# Altium PCB plantGrowthLeds_4chnl.PcbDoc
Units mm, origin at the board's own origin, x right, y up, seen from the top; angles counter-clockwise.
Board outline 98 x 80 mm, 2 copper layers (Top Layer, Bottom Layer), stack 0.971 mm thick; 39 components, 30 nets, 141 pads, 0 vias.
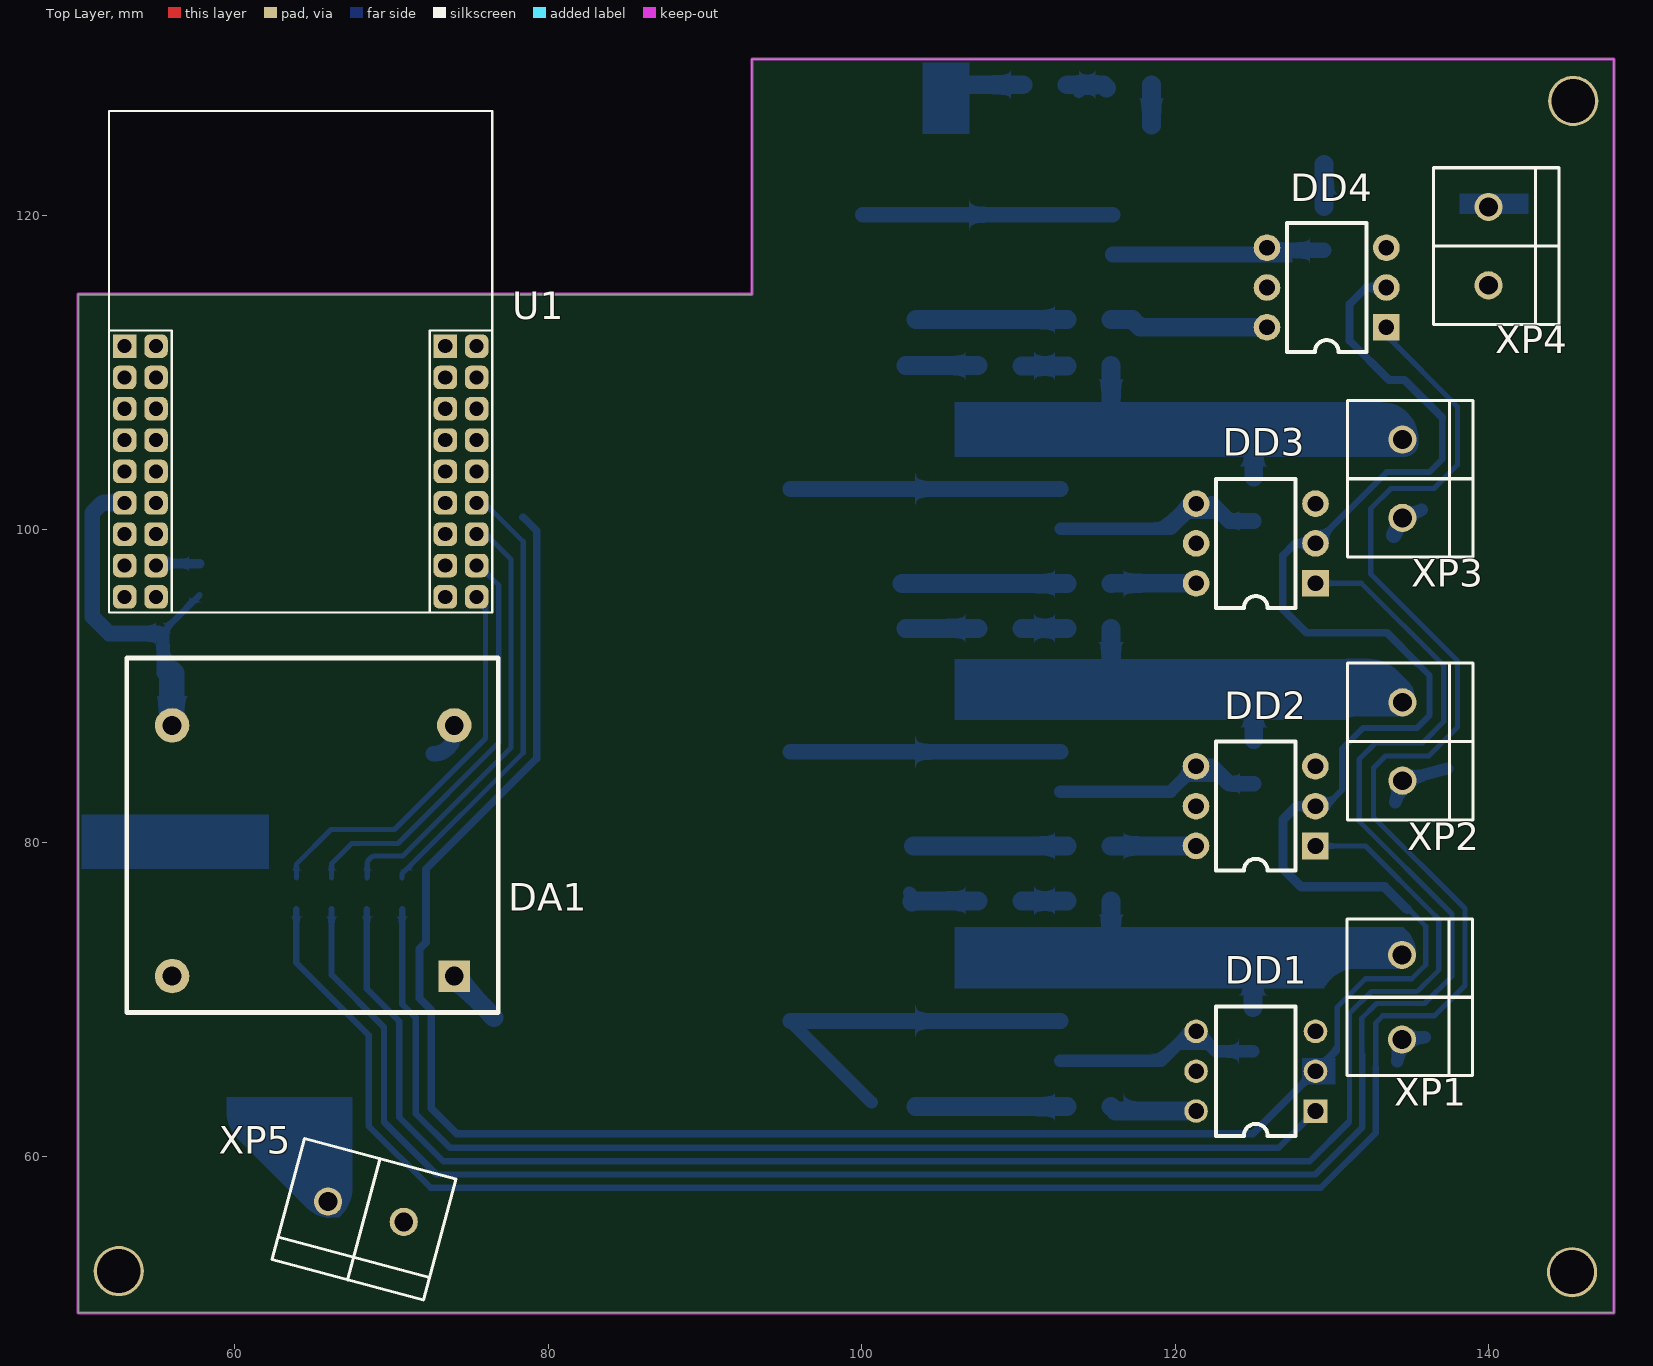
[diagram p0: Top Layer view]
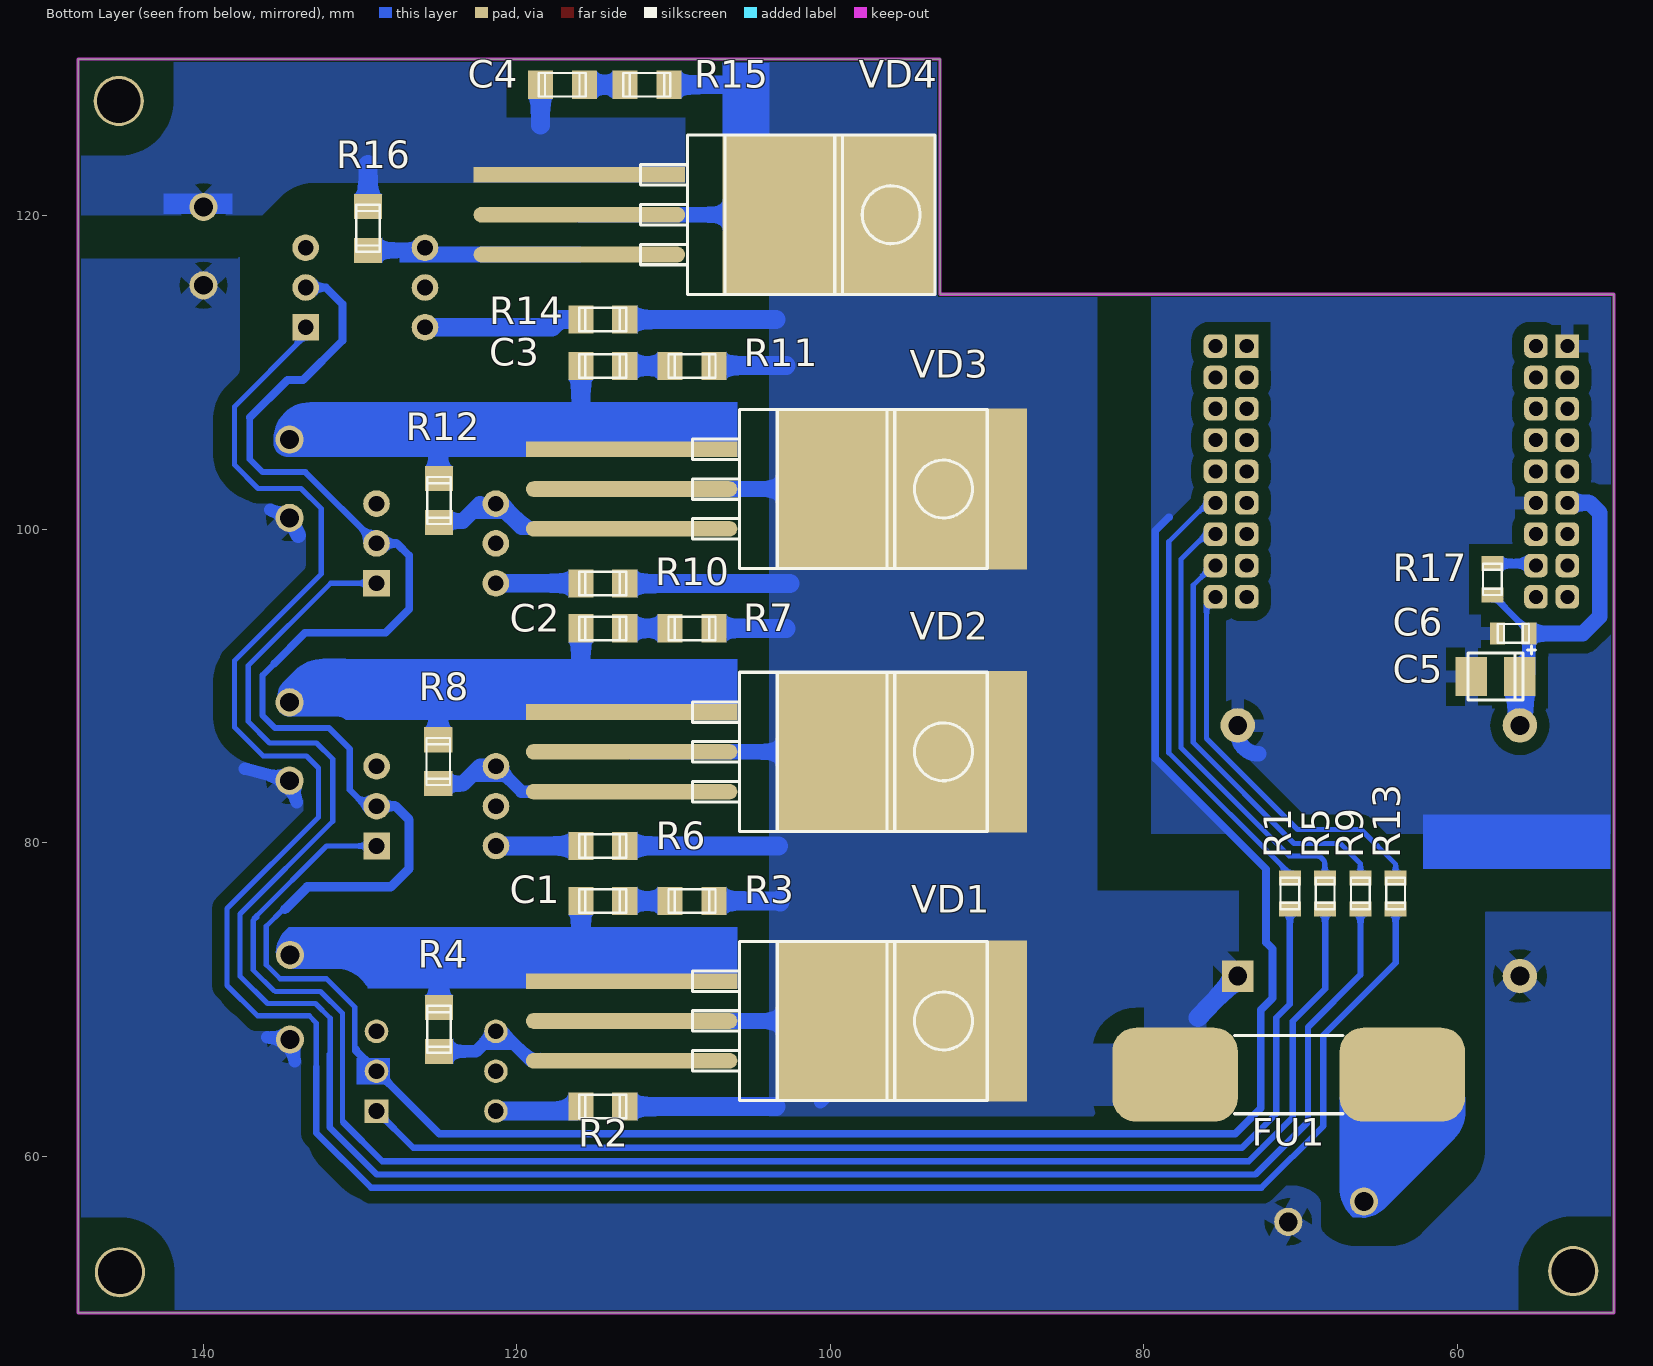
[diagram p1: Bottom Layer view, seen from below]
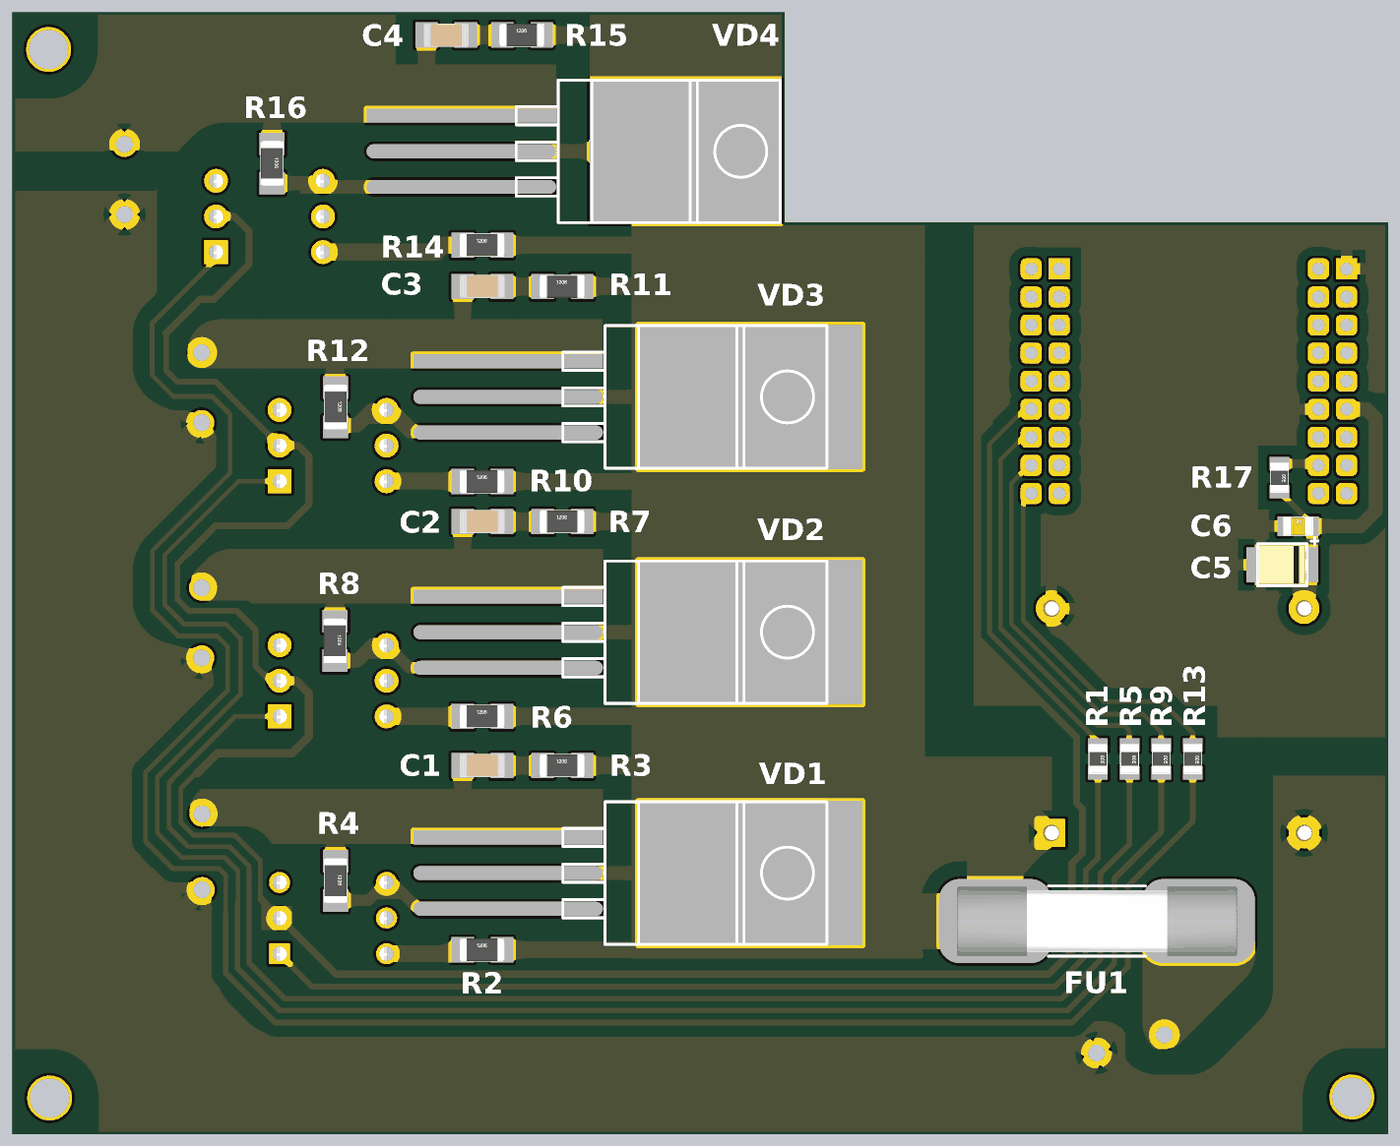
[diagram p2: 3D render of the assembled board from below, using the file's embedded part models]

## Layer stack, top to bottom
Top Solder: solder mask 0.0102, Solder Resist, Dk 3.5
Top Layer: signal copper 0.0356
Dielectric 1: core 0.9, FR-4, Dk 4.2
Bottom Layer: signal copper 0.0356
Solder Side: solder mask 0.0102, Solder Resist, Dk 3.5

## Board outline
50,50 50,115 93,115 93,130 148,130 148,50

## Design rules (kind name [scope] priority, off if disabled: settings)
AssemblyTestPointUsage AssemblyTestPointUsage_1 [All] p2:
AssemblyTestpoint AssemblyTestpoint_1 [All] p2: testpointundercomponent=TRUE minsize=1.016 maxsize=2.54 preferedsize=1.524 minholesize=0 maxholesize=1.016 preferedholesize=0.813 testpointgrid=0.025 usegrid=TRUE gridtolerance=0 allowsidetop=TRUE allowsidebottom=TRUE
Clearance Clearance_KeepOut [(OnLayer('Keep-Out Layer'))] p1: gap=0.1
Clearance Clearance_POLY [InPolygon] p2: gap=0.8
Clearance Clearance_Comm [All] p3: gap=0.45
ComponentClearance [All] p1 off: gap=0.2 collisioncheckmode=3 verticalgap=0.01 showdistances=FALSE
DiffPairsRouting [All] p1: maxlimit=0.5 minlimit=0.2 mostfreqgap=0.25 toplayer_minwidth=0.2 toplayer_maxwidth=0.2 toplayer_prefwidth=0.2 bottomlayer_minwidth=0.2 bottomlayer_maxwidth=0.2 bottomlayer_prefwidth=0.2 maxuncoupledlength=12.7
FabricationTestPointUsage TestPointUsage [All] p2: valid=0 allowmultiple=FALSE
FabricationTestpoint Testpoint [All] p2: side=3 testpointundercomponent=TRUE minsize=1.016 maxsize=2.54 preferedsize=1.524 minholesize=0 maxholesize=1.016 preferedholesize=0.813 testpointgrid=0.025 allowsidetop=TRUE allowsidebottom=TRUE usegrid=TRUE gridtolerance=0
FanoutControl Fanout_LCC [IsLCC] p1: bgadir=Out bgaviamode=Centered fanoutstyle=Auto fanoutdirection=Alternating viagrid=0.025 // Fanout_LCC (Default Rule)
FanoutControl Fanout_BGA [IsBGA] p2: bgadir=Out bgaviamode=Centered fanoutstyle=Auto fanoutdirection=Alternating viagrid=0.025 // Fanout_BGA (Default Rule)
FanoutControl Fanout_Small [(CompPinCount < 5)] p3: bgadir=Out bgaviamode=Centered fanoutstyle=Auto fanoutdirection=OutThenIn viagrid=0.025 // Fanout_Small (Default Rule)
FanoutControl Fanout_SOIC [IsSOIC] p4: bgadir=Out bgaviamode=Centered fanoutstyle=Auto fanoutdirection=Alternating viagrid=0.025 // Fanout_SOIC (Default Rule)
Height [All] p1 off: minheight=0 maxheight=25.4 prefheight=12.7
HoleSize [All] p1: absolutevalues=TRUE maxlimit=6 minlimit=0 maxpercent=80.000 minpercent=20.000
HoleToHoleClearance [All] p1: gap=0.25 allowstackedmicrovias=TRUE
MatchedLengths [InDifferentialPairClass('USB')] p1: tolerance=0.5 checknetsindiffpair=TRUE checkdiffpairvsdiffpair=FALSE checkxsignals=FALSE checkothers=FALSE
MinimumAnnularRing [All] p1: minimumring=0.15
MinimumSolderMaskSliver [All] p1 off: minsoldermaskwidth=0.1
MinimumSolderMaskSliver SilkscreenOverComponentPads [All] p2 off: minsoldermaskwidth=0.254
NetAntennae [All] p1 off: netantennaetolerance=0
PlaneClearance [All] p1: clearance=0.3
PlaneConnect [All] p1: planeconnectstyle=Relief reliefexpansion=0.5 reliefentries=4 reliefconductorwidth=0.3 reliefairgap=0
PolygonConnect PolygonConnect_FUSE [HasFootprint('FUSE_20x5mm_GLASS')] p1: connectstyle=Relief reliefconductorwidth=4 reliefentries=4 polygonreliefangle="90 Angle" airgapwidth=1.25
PolygonConnect PolygonConnect_TRIAC [HasFootprint('TO220-lie')] p2: connectstyle=Direct reliefconductorwidth=0.254 reliefentries=4 polygonreliefangle="90 Angle" airgapwidth=0.254
PolygonConnect PolygonConnect_GND [InNet('GND')] p3: connectstyle=Relief reliefconductorwidth=0.8 reliefentries=4 polygonreliefangle="90 Angle" airgapwidth=0.6
PolygonConnect Common [All] p4: connectstyle=Relief reliefconductorwidth=1.25 reliefentries=4 polygonreliefangle="45 Angle" airgapwidth=0.6
RoutingVias [All] p1: holewidth=0.3 width=0.6 viastyle="Through Hole" minholewidth=0.3 minwidth=0.6 maxholewidth=1.5 maxwidth=3
SilkToSilkClearance [All] p1 off: silktosilkclearance=0.254
SilkToSolderMaskClearance [IsPad] p1 off: minsilkscreentomaskgap=0.254 clearancetoexposedcopper=TRUE
SolderMaskExpansion [All] p1: expansion=0.2
ViasUnderSMD [All] p1: allowed=FALSE
Width [All] p1: maxlimit=10 minlimit=0.33 preferedwidth=0.33
15 further rules are at their usual default settings.

## Components (designator, comment, footprint, x,y, rotation, side; value= is the part's Value field where it differs from the comment)
C1 "0.01u" C1206 114.52,76.29 r180 bottom
C2 "0.01u" C1206 114.52,93.68 r180 bottom
C3 "0.01u" C1206 114.52,110.43 r180 bottom
C4 "0.01u" C1206 117.095,128.365 r180 bottom
C5 "47.0uF" C_B_COMPACT 59.1,90.6 r180 bottom
C6 "1.0uF" C0805_COMPACT 56.415,93.355 r180 bottom
DA1 "ZP01SXX00W" ZP01SXX0W 65,80.49 r180 top locked
DD1 "MOC3041" DIP6#1 128.96,62.88 r180 top
DD2 "MOC3041" DIP6#2 128.955,79.795 r180 top
DD3 "MOC3041" DIP6#2 128.96,96.56 r180 top
DD4 "MOC3041" DIP6#2 133.485,112.89 r180 top
FU1 "FUSE_BOARD" FUSE_20x5mm_GLASS 78,65.205 r180 bottom
R1 "330" R0805_COMPACT 70.675,76.76 r270 bottom
R2 "360" R1206 114.52,63.16 r180 bottom
R3 "39" R1206 108.82,76.29 r180 bottom
R4 "330" R1206 124.975,68.08 r270 bottom
R5 "330" R0805_COMPACT 68.425,76.76 r270 bottom
R6 "360" R1206 114.52,79.795 r180 bottom
R7 "39" R1206 108.82,93.68 r180 bottom
R8 "330" R1206 125.02,85.17 r270 bottom
R9 "330" R0805_COMPACT 66.175,76.76 r270 bottom
R10 "360" R1206 114.52,96.535 r180 bottom
R11 "39" R1206 108.82,110.43 r180 bottom
R12 "330" R1206 124.975,101.83 r270 bottom
R13 "330" R0805_COMPACT 63.925,76.76 r270 bottom
R14 "360" R1206 114.52,113.385 r180 bottom
R15 "39" R1206 111.695,128.365 r180 bottom
R16 "330" R1206 129.495,119.2 r270 bottom
R17 "1M" R0805_COMPACT 57.75,96.81 r270 bottom
U1 "CoreNRF51822" BOARD_CORE_NRF51822 64.2,94.69 r0 top locked
VD1 "BT139" TO220-lie#1 112.685,71.165 r270 bottom
VD2 "BT139" TO220-lie#1 112.685,88.34 r270 bottom
VD3 "BT139" TO220-lie#1 112.685,105.11 r270 bottom
VD4 "BT139" TO220-lie#2 116.015,122.615 r270 bottom
XP1 "DT126-2" DT126-2-5mm#1 134.48,72.64 r270 top locked
XP2 "DT126-2" DT126-2-5mm#2 134.51,88.96 r270 top locked
XP3 "DT126-2" DT126-2-5mm#2 134.51,105.73 r270 top locked
XP4 "DT126-2" DT126-2-5mm#2 140,120.57 r270 top
XP5 "DT126-2" DT126-2-5mm#2 70.78,55.806 r165 top

## Footprints (in the part's own frame and the unit in brackets; to place one, negate y for a bottom-side part, rotate by r counter-clockwise, add the part's x,y. Pads: shape width x height; smd on the part's side, far side on the other; paste and mask are expansions set on the pad)
BOARD_CORE_NRF51822 [mm]
  rect 1.5x1.5 hole 0.9: 1(-11.23,17) 19(9.23,17)
  rrect50% 1.5x1.5 hole 0.9: 2(-9.23,17) 3(-11.23,15) 4(-9.23,15) 5(-11.23,13) 6(-9.23,13) 7(-11.23,11) 8(-9.23,11) 9(-11.23,9) 10(-9.23,9) 11(-11.23,7) 12(-9.23,7) 13(-11.23,5) 14(-9.23,5) 15(-11.23,3) 16(-9.23,3) 17(-11.23,1) 18(-9.23,1) 20(11.23,17) 21(9.23,15) 22(11.23,15) 23(9.23,13) 24(11.23,13) 25(9.23,11) 26(11.23,11) 27(9.23,9) 28(11.23,9) 29(9.23,7) 30(11.23,7) 31(9.23,5) 32(11.23,5) 33(9.23,3) 34(11.23,3) 35(9.23,1) 36(11.23,1)
  silkscreen extent -12.23,0 12.23,32
C0805_COMPACT [mm] "SMD 0805 Capacitor"
  rect 0.95x1.4 smd: 1(-1,0) 2(1,0)
  silkscreen extent -1,-0.6 1,0.6, body extent -1,-0.63 1,0.62, height 0.78
C1206 [mm] "SMD 1206 Capacitor"
  rect 1.6x1.8 smd: 1(-1.4,0) 2(1.4,0)
  silkscreen extent -1.51,-0.75 1.49,0.75, body extent -1.6,-0.8 1.6,0.8, height 0.79
C_B_COMPACT [mm] "SMD B-Size (3528) Capacitor"
  rect 2x2.5 smd: 1(3.1,0) 2(0,0)
  silkscreen extent -0.2,-1.5 4.1,1.95, body extent -0.2,-1.4 3.3,1.4, height 1.91
DIP6#1 [mm]
  rect 1.5x1.5 hole 1: 1(0,0)
  round 1.5 hole 1: 2(0,-2.54) 3(0,-5.08) 4(7.62,-5.08) 5(7.62,-2.54) 6(7.62,0)
  silkscreen extent 1.27,-6.66 6.35,1.58, body extent -0.2,-6.05 7.67,1.07, height 5.3
DIP6#2 [mm]
  rect 1.7x1.7 hole 1: 1(0,0)
  round 1.7 hole 1: 2(0,-2.54) 3(0,-5.08) 4(7.62,-5.08) 5(7.62,-2.54) 6(7.62,0)
  silkscreen extent 1.27,-6.66 6.35,1.58, body extent -0.2,-6.05 7.67,1.07, height 5.3
DT126-2-5mm#1 [mm]
  round 1.8 hole 1.2: 1(-0.2,0) 2(5.2,0)
  silkscreen extent -2.5,-3.5 7.5,4.5
DT126-2-5mm#2 [mm]
  round 1.8 hole 1.2: 1(0,0) 2(5,0)
  silkscreen extent -2.5,-3.5 7.5,4.5
FUSE_20x5mm_GLASS [mm]
  rrect50% 8x6 smd: 1(0,0) 2(14.5,0)
  silkscreen extent 3.8,-2.5 10.7,2.5, body extent -2.73,-2.51 17.27,2.49, height 5
R0805_COMPACT [mm] "SMD 0805 Resistor"
  rect 0.95x1.4 smd: 1(-1,0) 2(1,0)
  silkscreen extent -1,-0.6 1,0.6, body extent -1,-0.63 1,0.62, height 0.78
R1206 [mm] "SMD 1206 Resistor"
  rect 1.6x1.8 smd: 1(-1.4,0) 2(1.4,0)
  silkscreen extent -1.51,-0.75 1.49,0.75, body extent -1.62,-0.8 1.58,0.8, height 1
TO220-lie#1 [mm]
  rect 1x13.5 smd: 1(0,0)
  oval 1x13.5 smd: 2(2.54,0) 3(5.08,0)
  rect 10.3x16 smd: 4(2.54,17.25)
  silkscreen extent -2.54,3.9 7.62,22.7
TO220-lie#2 [mm]
  rect 1x13.5 smd: 1(0,0)
  oval 1x13.5 smd: 2(2.54,0) 3(5.08,0)
  rect 10.3x13.6 smd: 4(2.54,15.95)
  silkscreen extent -2.54,3.9 7.62,22.7
ZP01SXX0W [mm]
  rect 2x2 hole 1.2: 1(-9,9)
  round 2.2 hole 1.2: 2(9,9) 3(9,-7) 4(-9,-7)
  silkscreen extent -11.8,-11.3 11.9,11.32, body extent -11.45,-11 11.55,11, height 15.5

## Part data
C1 C2 C3 C4: library part C1206, "Capacitor Chip 1206, Non-Polarized"
C5: library part Cap_Ta_B-Size, "Capacitor Polarized Tantalum, B-Size"
C6: library part C0805, "Capacitor Chip 0805, Non-Polarized"
DA1: "AC-DC 1W Single Output Converter"
DD1 DD2 DD3 DD4: "Optoisolators Triac Driver Output 400V"
FU1: "Fuse Board"
R1 R5 R9 R13 R17: library part R0805, "Resistor Chip 0805"
R2 R3 R4 R6 R7 R8 R10 R11 R12 R14 R15 R16: library part R1206, "Resistor Chip 1206"
U1: "board Core NRF51822"
VD1: library part BT139_HEAT, "Triac"
VD2 VD3 VD4: "Triac"
XP1 XP2 XP3 XP4 XP5: "Screw terminal 2 way 5mm"

## Free pads (board coordinates)
  round 3.2 hole 2.8 unplated: 0(52.595,52.665) 0(145.335,52.595) 0(145.405,127.335)

## Nets (pads, with @x,y where several pads share a name; then routed paths per layer and width w, separated by ;. In a path a pad name is that pad's centre, name@x,y a point inside that pad or via, vN(x,y) a via of type N, cw(c..) or ccw(c..) an arc to the next point about the centre after c; other vN are vias at no path point)
+3V3: C5.1 C6.2 DA1.3 R17.2 U1.11 | length 23.5
  Bottom Layer w0.4: C6.2 55.415,93.475 R17.2
  Bottom Layer w0.5: 50.905,97.69 50.905,97.72
  Bottom Layer w0.8: C6.2 55.415,90.815 C5.1@55.96,90.815
  Bottom Layer w1: 50.905,97.69 50.905,94.435 51.985,93.355 C6.2@55.105,93.355 ; 50.905,97.72 50.905,101.06 51.535,101.69 U1.11
  Bottom Layer w1.6: C5.1@55.96,90.815 55.975,90.8 55.975,90.6 DA1.3@55.975,87.475
AC_IN_1: DA1.1 FU1.1 R2.2 R3.2 R6.2 R7.2 R10.2 R11.2 R14.2 R15.2 VD1.2 VD1.4 VD2.2 VD2.4 VD3.2 VD3.4 VD4.2 VD4.4 | length 136
  Bottom Layer w0.8: VD1.4 100.635,63.425 ; 103.05,76.815 103.125,76.74 103.125,76.72
  Bottom Layer w1: VD1.4 VD1.2 ; VD2.4 VD2.2 ; VD3.4 VD3.2 ; VD4.4 VD4.2 ; R11.2 R11.2@107.42,110.45
  Bottom Layer w1.2: DA1.1 76.53,68.83 ; 102.58,96.535 R10.2 ; 102.81,93.68 R7.2 ; 102.81,110.45 R11.2@107.42,110.45 ; 103.195,76.215 cw(c103.27,76.215) 103.27,76.29 R3.2 ; 103.3,79.795 R6.2 ; 103.455,63.16 R2.2 ; 103.46,113.385 R14.2 ; 106.36,128.365 R15.2
AC_IN_2: DA1.2 XP1.2 XP2.2 XP3.2 XP4.2 XP5.1 | length 9.8
  Bottom Layer w0.8: 134.06,82.6 XP2.2 137.38,84.725 ; 134.17,66.07 XP1.2 135.92,67.585 ; XP3.2 135.725,101.235
  Bottom Layer w1: 133.945,99.625 XP3.2
CHNL1: R1.1 U1.30 | length 28.6
  Bottom Layer w0.33: R1.1 70.675,78.016 78.4,85.741 78.4,99.21 75.92,101.69 U1.30
CHNL2: R5.1 U1.32 | length 28.1
  Bottom Layer w0.33: R5.1 ccw(c68.425,77.78) 68.445,77.78 68.445,78.595 cw(c69.005,78.595) 69.005,79.155 70.711,79.155 77.62,86.064 77.62,98.095 76.025,99.69 U1.32
CHNL3: R9.1 U1.34 | length 26.7
  Bottom Layer w0.33: R9.1 66.175,78.66 67.465,79.95 70.403,79.95 76.84,86.387 76.84,96.43 75.58,97.69 U1.34
CHNL4: R13.1 U1.36 | length 25.5
  Bottom Layer w0.33: R13.1 63.925,78.63 66.135,80.84 70.19,80.84 75.995,86.645 75.995,95.125 U1.36
GND: C5.2 C6.1 DA1.4 DD1.2 DD2.2 DD3.2 DD4.2 U1.1 U1.12 | length 190
  Bottom Layer w0.33: DD3.2@128.93,99.1 DD3.2 ; DD2.2 DD2.2@128.955,82.72 ; 130.345,66.805 130.345,69.52 132.15,71.325 135.108,71.325 135.995,72.212 135.995,74.67 134.92,75.745
  Bottom Layer w0.4: DD3.2@128.41,99.1 DD3.2@128.93,99.1 ; DD2.2 129.635,82.335 130.675,83.375 130.675,85.985 132.015,87.325 135.44,87.325 136.23,88.115 136.23,90.69 135.49,91.43 ; DD3.2 133.51,103.65 136.225,103.65 137.045,104.47 137.045,107.13 ; 134.805,75.745 134.92,75.745
  Bottom Layer w0.5: 78.395,100.77 79.265,99.9 79.265,85.382 72.19,78.307 72.19,73.63 71.775,73.215 71.775,70.09 72.535,69.33 72.535,63.06 74.165,61.43 124.949,61.43 DD1.2@128.939,65.42 ; DD3.2@128.41,99.1 127.65,99.1 126.87,98.32 126.87,94.91 128.385,93.395 133.525,93.395 135.49,91.43 ; DD1.2 130.27,66.73 130.27,66.805 ; DD4.2 132.19,115.43 131.14,114.38 131.14,112.035 133.645,109.53 134.645,109.53 137.045,107.13
  Bottom Layer w0.6: DD2.2 127.745,82.335 126.885,81.475 126.885,78.34 128.045,77.18 133.37,77.18 134.805,75.745
  Bottom Layer w1: 72.67,85.67 ccw(c72.67,87) 74,87 DA1.4
NetC1_1: C1.1 R4.1 VD1.1 XP1.1 | length 9
  Bottom Layer w1: 129.266,71.219 cw(c131.593,69.692) 131.545,72.475
  Bottom Layer w1.2: 115.92,72.675 C1.1 ; R4.1 124.975,72.17
NetC1_2: C1.2 R3.1 | length 2.9
  Bottom Layer w1.2: R3.1 C1.2
NetC2_1: C2.1 R8.1 VD2.1 XP2.1 | length 6.2
  Bottom Layer w1.2: 115.92,89.845 C2.1 ; R8.1 125.02,88.92
NetC2_2: C2.2 R7.1 | length 2.9
  Bottom Layer w1.2: R7.1 C2.2
NetC3_1: C3.1 R12.1 VD3.1 XP3.1 | length 6.2
  Bottom Layer w1.2: 115.92,106.615 C3.1 C3.1@115.92,110.45 ; R12.1@125.025,103.335 125.025,105.685
NetC3_2: C3.2 R11.1 | length 2.9
  Bottom Layer w1.2: R11.1 C3.2
NetC4_1: C4.1 R16.1 VD4.1 XP4.1 | length 5.3
  Bottom Layer w1.2: 118.495,125.79 C4.1 ; R16.1 129.495,123.29
NetC4_2: C4.2 R15.1 | length 2.6
  Bottom Layer w0.8: R15.1@113.66,128.14 R15.1@113.865,127.935
  Bottom Layer w1.2: R15.1 C4.2@115.425,128.365
NetDD1_1: DD1.1 R1.2 | length 72.7
  Bottom Layer w0.4: R1.2 70.675,69.7 71.55,68.825 71.55,62.71 73.73,60.53 126.61,60.53 DD1.1
NetDD1_4: DD1.4 R4.2 VD1.3 | length 13.9
  Bottom Layer w0.8: VD1.3 119.106,66.085 120.981,67.96 DD1.4 ; DD1.4@121.68,67.96 DD1.4 ; R4.2 122.62,66.68 DD1.4
NetDD1_6: DD1.6 R2.1 | length 5.6
  Bottom Layer w0.8: DD1.6@121.325,62.895 DD1.6
  Bottom Layer w1.2: R2.1 116.2,62.88 DD1.6
NetDD2_1: DD2.1 R5.2 | length 103.8
  Bottom Layer w0.33: DD2.1 132.153,79.795 136.604,75.344 ; 131.135,62.215 131.135,69.123 132.527,70.515 135.401,70.515 ; 135.521,70.565 136.825,71.869 136.825,75.028 136.604,75.249 136.604,75.344 ; 136.775,75.173 136.604,75.344
  Bottom Layer w0.4: R5.2 68.425,70.677 70.495,68.607 70.495,62.48 73.295,59.68 128.6,59.68 131.1,62.18
NetDD2_4: DD2.4 R8.2 VD2.3 | length 13.5
  Bottom Layer w0.8: VD2.3 119.72,83.26 DD2.4
  Bottom Layer w1: DD2.4 122.345,84.875 123.45,83.77 R8.2
NetDD2_6: DD2.6 R6.1 | length 5.4
  Bottom Layer w0.8: DD2.6 DD2.6@121.34,79.79
  Bottom Layer w1.2: R6.1@115.925,79.79 R6.1 DD2.6
NetDD3_1: DD3.1 R9.2 | length 130.7
  Bottom Layer w0.33: DD3.1 131.885,96.56 137.145,91.3 137.145,87.736 135.779,86.37 132.78,86.37 131.75,85.34 131.75,81.372 137.67,75.452 137.67,71.48 135.925,69.735 132.85,69.735 131.915,68.8 131.915,66.25
  Bottom Layer w0.4: R9.2 66.175,71.57 69.52,68.225 69.52,62.223 69.541,62.201 ; 69.52,62.18 72.87,58.83 128.952,58.83 131.95,61.828 131.95,66.505
NetDD3_4: DD3.4 R12.2 VD3.3 | length 14.7
  Bottom Layer w0.8: VD3.3@112.69,100.025 119.725,100.025 DD3.4 ; VD3.3@119.265,100.03 DD3.4@120.875,101.64
  Bottom Layer w1: 122.35,101.64 123.455,100.535 R12.2@125.025,100.535
NetDD3_6: DD3.6 R10.1 | length 5.4
  Bottom Layer w1.2: R10.1 115.945,96.56 DD3.6
NetDD4_1: DD4.1 R13.2 | length 153.1
  Bottom Layer w0.33: 132.8,65.72 132.8,68.5 133.255,68.955 136.56,68.955 138.5,70.895 138.5,75.796 132.665,81.631 132.665,84.775 133.42,85.53 136.184,85.53 138.025,87.371 138.025,91.61 132.49,97.145 132.49,101.325 133.77,102.605 136.52,102.605 138.03,104.115 138.03,107.825 133.485,112.37 DD4.1
  Bottom Layer w0.4: R13.2 63.925,72.335 68.55,67.71 68.55,61.92 72.49,57.98 129.304,57.98 132.8,61.476 132.8,65.72
NetDD4_4: DD4.4 R16.2 VD4.3 | length 13.7
  Bottom Layer w1: VD4.3 124.815,117.535 ccw(c124.815,119.02) DD4.4 ; DD4.4@125.865,117.99 DD4.4 ; R16.2 126.035,117.8 DD4.4
NetDD4_6: DD4.6 R14.1 | length 10.2
  Bottom Layer w1.2: R14.1 117.275,113.385 117.77,112.89 DD4.6
NetFU1_2: FU1.2 XP5.2
NetR17_1: R17.1 U1.16 | length 2.9
  Bottom Layer w0.6: U1.16 54.97,97.81 R17.1
pads on no net: DD1.3 DD1.5 DD2.3 DD2.5 DD3.3 DD3.5 DD4.3 DD4.5 U1.2 U1.3 U1.4 U1.5 U1.6 U1.7 U1.8 U1.9 U1.10 U1.13 U1.14 U1.15 U1.17 U1.18 U1.19 U1.20 U1.21 U1.22 U1.23 U1.24 U1.25 U1.26 U1.27 U1.28 U1.29 U1.31 U1.33 U1.35

## Polygon pours and split planes (outlines as drawn)
NetC4_1 on Bottom Layer "AC_IN2" (solid, remove dead copper, pour order 15): 109.26,122.115 109.26,130.015 148.015,130.015 148.015,120.055 136.24,120.055 135.078,121.217 ccw(c132.91,119.049) 132.91,122.115
GND on Bottom Layer "g" (solid, remove dead copper, pour order 10): 49.918,80.565 49.918,115.04 79.51,115.04 79.51,80.565
AC_IN_1 on Bottom Layer "AC_IN1" (solid, remove dead copper, pour order 14): 103.885,64.035 103.885,62.545 73.935,62.545 73.935,76.935 82.98,76.935 82.98,132 103.885,132
AC_IN_2 on Bottom Layer "AC_IN2" (solid, pour order 21): 50,49.95 cw(c50,50) 49.95,50 49.95,75.54 cw(c50,75.54) 50,75.59 58.16,75.59 cw(c58.16,75.54) 58.21,75.54 58.21,60.36 ccw(c61.226,60.36) 59.094,58.228 62.193,55.129 ccw(c64.325,57.261) 64.325,54.245 66.395,54.245 ccw(c66.395,57.261) 68.527,55.129 ccw(c68.075,55.581) 68.715,55.581 68.715,56.95 cw(c69.465,56.95) 68.934,57.481 cw(c70.419,55.997) 70.419,58.095 71.53,58.095 cw(c71.53,58.045) 71.566,58.08 72.541,57.105 129.035,57.105 ccw(c129.035,60.121) 131.167,57.989 132.536,59.358 ccw(c130.404,61.49) 133.42,61.49 133.42,68.38 cw(c133.47,68.38) 133.47,68.43 136.255,68.43 ccw(c136.255,71.446) 138.387,69.314 138.506,69.433 ccw(c136.374,71.565) 139.39,71.565 139.39,74.725 ccw(c136.374,74.725) 138.506,76.857 134.111,81.252 cw(c135.709,82.85) 133.458,82.657 cw(c133.5,82.685) 133.45,82.685 133.45,84.9 cw(c133.5,84.9) 133.5,84.95 136.285,84.95 ccw(c136.285,87.966) 138.417,85.834 138.536,85.953 ccw(c136.404,88.085) 139.42,88.085 139.42,90.23 ccw(c136.404,90.23) 138.536,92.362 133.772,97.127 cw(c134.55,97.905) 133.45,97.905 133.45,101.67 cw(c133.5,101.67) 133.5,101.72 136.285,101.72 ccw(c136.285,104.736) 138.417,102.604 138.536,102.723 ccw(c136.404,104.855) 139.42,104.855 139.42,107 ccw(c136.404,107) 138.536,109.132 137.88,109.789 cw(c138.351,110.26) 137.685,110.26 137.685,117.315 cw(c137.735,117.315) 137.736,117.265 148.05,117.265 148.05,50 cw(c148,50) 148,49.95

## Keep-outs
Keep-Out Layer:
  the board outline again, w0.2

## Other copper
Bottom Layer:
  rectangle net NetC4_1: 138.135,120.125 142.55,121.415
  rectangle net AC_IN_1: 103.885,125.225 106.865,129.796
  rectangle net NetC1_1: 105.935,70.705 129.545,74.615
  rectangle net GND: 50.204,78.31 62.18,81.815
  rectangle net NetDD1_4: 120.11,66.765 122,67.395
  rectangle net GND: 128.095,64.56 130.25,66.27
  rectangle net NetDD2_4: 120.49,83.885 122.925,84.75
  rectangle net NetDD3_4: 120.495,100.65 122.93,101.515
  rectangle net NetDD4_4: 124.35,117.03 127.495,117.585
  rectangle net NetC1_1: 129.545,71.95 134.565,74.615
  rectangle net NetC2_1: 105.935,87.84 130.93,91.73
  pour cut-out: 120.683,130.265 109.205,130.265 109.205,126.25 120.683,126.25
  pour cut-out: 53.968,111.28 53.968,102.61 51.61,102.61 51.61,111.28
  pour cut-out: 50.015,102.865 51.61,102.865 51.61,102.61 50.015,102.61
  pour cut-out: 73.665,69.99 76.005,69.99 76.005,68.84 73.665,68.84
  pour cut-out: 141.905,129.924 141.905,127.335 ccw(c145.405,127.335) 145.405,123.835 148.07,123.835 148.07,129.924
  pour cut-out: 141.835,50.006 141.835,52.595 cw(c145.335,52.595) 145.335,56.095 148,56.095 148,50.006
  pour cut-out: 56.095,50.076 56.095,52.665 ccw(c52.595,52.665) 52.595,56.165 49.93,56.165 49.93,50.076
  pour cut-out: 56.328,102.14 56.328,112.065 ccw(c55.343,112.065) 55.343,113.05 53.4,113.05 53.4,102.14
  pour cut-out: 56.328,101.255 56.328,95.31 cw(c55.343,95.31) 55.343,94.325 52.185,94.325 52.185,101.255
  pour cut-out: 76.788,102.14 76.788,112.065 ccw(c75.803,112.065) 75.803,113.05 72.07,113.05 72.07,102.14
  pour cut-out: 76.788,102.655 76.788,95.315 cw(c75.803,95.315) 75.803,94.33 74.355,94.33 74.355,102.655
  pour cut-out: 72.072,102.655 72.072,95.315 ccw(c73.057,95.315) 73.057,94.33 74.505,94.33 74.505,102.655
  region net NetC3_1: 135.52,105.785 ccw(c133.205,105.785) 133.205,108.1 105.945,108.1 105.945,104.615 134.61,104.615 ccw(c134.61,105.525) 135.52,105.525
  region net NetFU1_2: 66.07,56.07 cw(c66.07,58.098) 64.636,56.664 60.214,61.086 cw(c62.01,62.882) 59.47,62.882 59.47,63.755 67.44,63.755 cw(c67.44,63.67) 67.5,63.73 67.5,57.997 cw(c64.96,57.997) 66.756,56.201 66.66,56.105
  region net NetC2_1: 130.93,87.84 cw(c131.461,87.309) 131.461,88.06 134.58,88.06 ccw(c134.58,88.735) 135.255,88.735 135.255,89.46 ccw(c134.181,89.46) 134.94,90.22 134.174,90.986 ccw(c132.378,89.19) 132.378,91.73 130.93,91.73
  region net NetC1_1: 134.565,74.615 134.785,74.395 cw(c133.359,72.97) 135.375,72.97 135.109,72.97 cw(c135.109,73.824) 134.505,73.22

## Silkscreen, mask and mechanical layers (free items; w line width, h text height)
Mechanical 4:
  lines w0.1: 62.157,55.093 59.058,58.192 cw(c61.226,60.36) 58.16,60.36 58.16,75.54 50,75.54 50,50 148,50 148,117.315 137.91,117.315 137.735,117.315 137.735,110.26 ccw(c138.351,110.26) 137.915,109.825 138.572,109.168 cw(c136.404,107) 139.47,107 139.47,104.855 cw(c136.404,104.855) 138.572,102.687 138.453,102.568 cw(c136.285,104.736) 136.285,101.67 133.5,101.67 133.5,97.905 ccw(c134.55,97.905) 133.808,97.162 138.572,92.398 cw(c136.404,90.23) 139.47,90.23 139.47,88.085 cw(c136.404,88.085) 138.572,85.917 138.453,85.798 cw(c136.285,87.966) 136.285,84.9 133.5,84.9 133.5,82.685 ; 62.157,55.093 ccw(c64.325,57.261) 64.325,54.195 66.395,54.195 ccw(c66.395,57.261) 68.563,55.093 ccw(c68.075,55.581) 68.765,55.581 68.765,56.95 cw(c69.465,56.95) 68.97,57.445 cw(c70.419,55.996) 70.419,58.045 71.53,58.045 72.52,57.055 129.035,57.055 ccw(c129.035,60.121) 131.203,57.953 132.572,59.322 ccw(c130.404,61.49) 133.47,61.49 133.47,64.615 133.47,68.38 136.255,68.38 ccw(c136.255,71.446) 138.423,69.278 138.542,69.397 ccw(c136.374,71.565) 139.44,71.565 139.44,73.71 139.44,74.725 ccw(c136.374,74.725) 138.542,76.893 134.147,81.288 cw(c135.709,82.85) 133.5,82.85
  text "ANT" at 60.625,122.495 h3
  text "AC IN" at 63.46,47.345 h3
  text "Plant Leds 4chnl v1.0" at 108.555,46.24 h4
  text "Nik Chizhov" at 127.305,40.495 h4
  text "2016" at 140.5,37.075 h4
Mechanical 15:
  lines w0.05: 70.655,49.995 50,49.995 50,80.865 56.77,80.865 cw(c56.77,79.595) 58.04,79.595 58.04,75.15 cw(c56.77,75.15) 56.77,73.88 55.65,73.88 ccw(c55.65,72.61) 54.38,72.61 54.38,72.445 54.38,64.375 ccw(c57.446,64.375) 55.278,62.207 62.072,55.413 ccw(c64.24,57.581) 64.24,54.515 68.015,54.515 68.92,54.515 ccw(c68.92,55.785) 70.19,55.785 70.19,58.105 cw(c71.46,58.105) 71.46,59.375 71.83,59.375 129.945,59.375 131.39,59.375 ccw(c131.39,60.645) 132.66,60.645 132.66,62.595 132.66,68.175 cw(c133.93,68.175) 133.93,69.445 135.995,69.445 ccw(c135.995,70.715) 137.265,70.715 137.265,74.64 ccw(c135.995,74.64) 135.995,75.91 133.96,75.91 cw(c133.96,77.18) 132.69,77.18 132.69,78.915 132.69,84.495 132.69,85.205 cw(c133.96,85.205) 133.96,86.475 135.995,86.475 ccw(c135.995,87.745) 137.265,87.745 137.265,91.41 ccw(c135.995,91.41) 135.995,92.68 133.96,92.68 cw(c133.96,93.95) 132.69,93.95 132.69,95.685 132.69,101.265 132.69,101.975 cw(c133.96,101.975) 133.96,103.245 135.995,103.245 ccw(c135.995,104.515) 137.265,104.515 137.265,108.18 ccw(c135.995,108.18) 135.995,109.45 133.96,109.45 cw(c133.96,110.72) 132.69,110.72 132.69,112.455 132.69,118.035 cw(c133.96,118.035) 133.96,119.305 136.025,119.305 ccw(c136.025,120.575) 137.295,120.575 137.295,124.5 cw(c138.15,124.5) 138.15,125.355 139.065,125.355 148,125.355 148,125.1 148,49.995 ; 148.03,86.125 148.03,50.025 cw(c148,50.025) 148,49.995 ; 148,49.995 70.595,49.995 148,49.995